# EAGLE board Arduino_MEGA2560_ref (EAGLE 8.0.1)
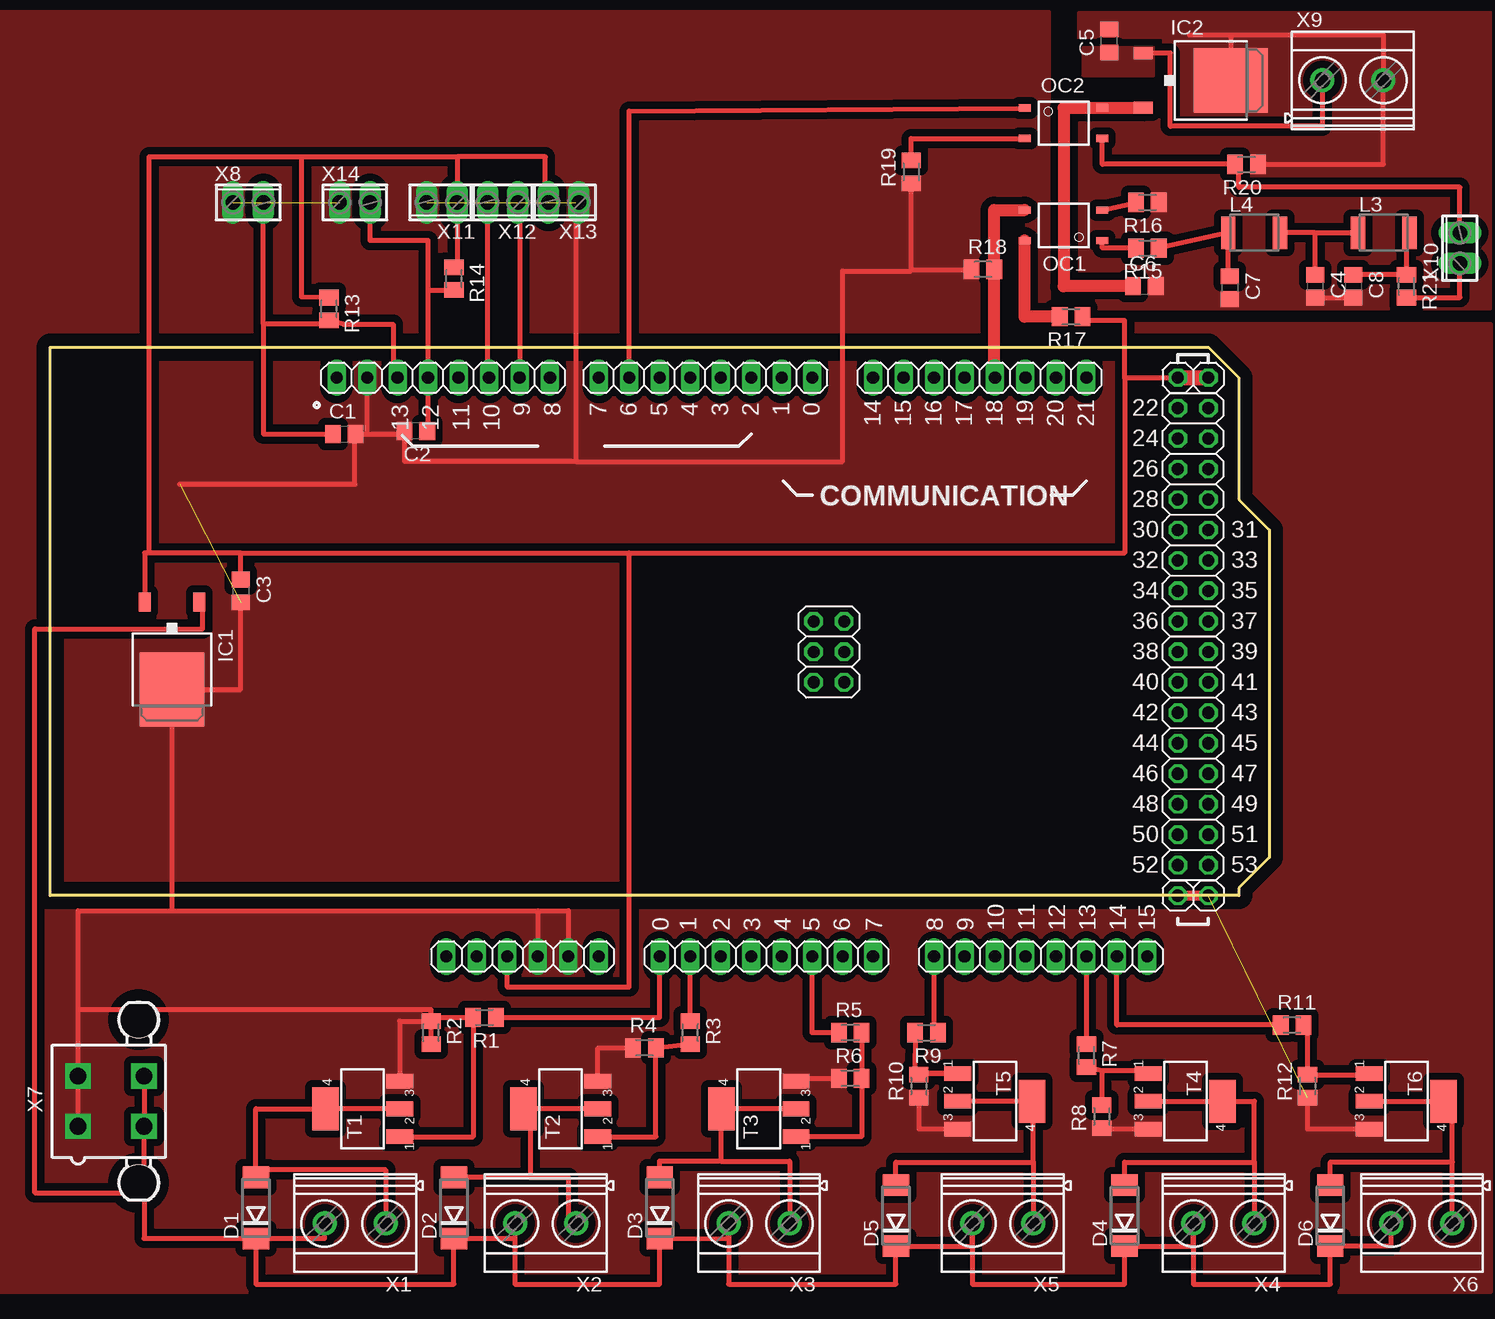
[diagram p0: board, top side]
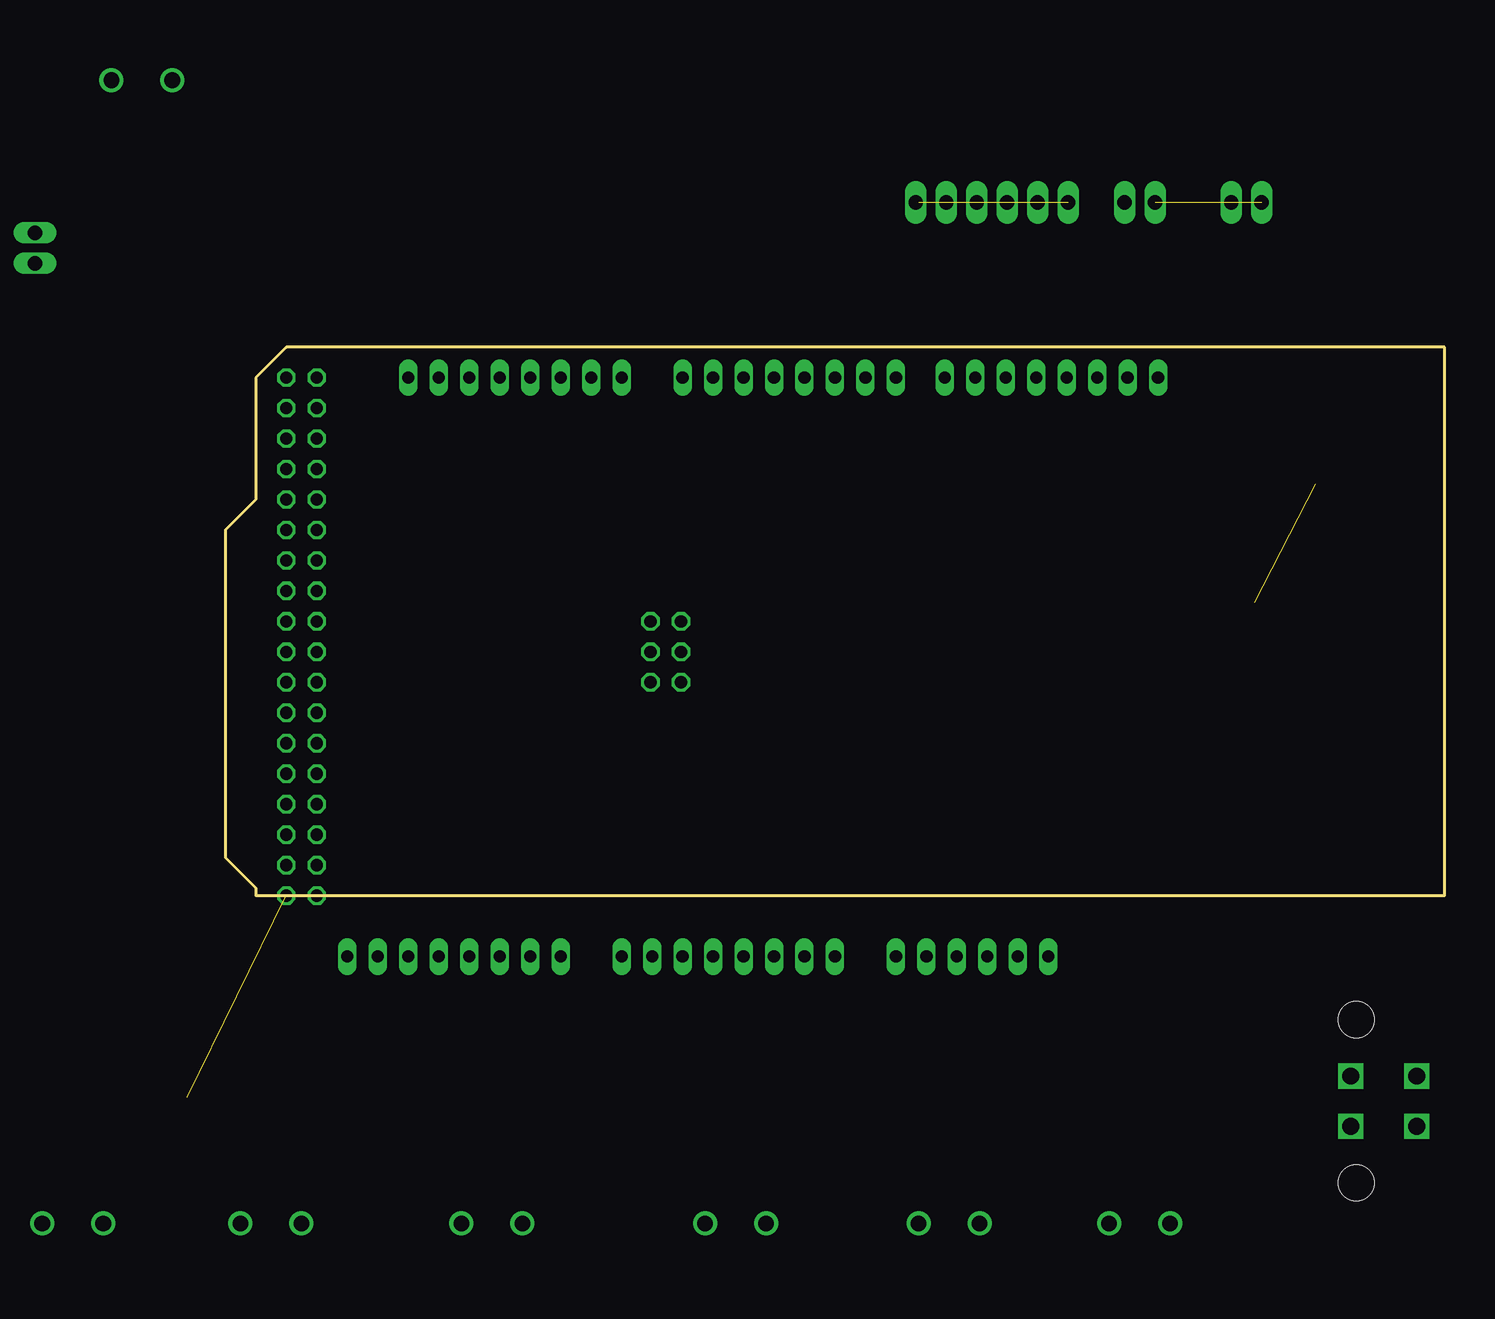
[diagram p1: board, bottom side, seen from below]

Size 101.6 x 45.72 mm. Coordinates in mm from the lower left corner, seen from the top.
Outline: 0,45.72 96.52,45.72 99.06,43.18 99.06,33.02 101.6,30.48 101.6,3.17 99.06,0.64 99.06,0 0,0 0,45.72
Copper layers (1*16): Top 0.035mm / dielectric 1.5mm / Bottom 0.035mm
Design rules "default *": minimum track width 6mil, minimum drill 12mil, track to track 6mil, track to pad 6mil, pad to pad 6mil, via to via 6mil, smd to smd 6mil, copper to edge 40mil, drill to drill 12mil, minimum pad ring 10mil, minimum via ring 10mil, stop-mask expansion 2mil, vias tented up to drill 1mil, thermal gap 10mil
Net classes: 0 default: width 0.152 mm, drill 0.305 mm, clearance 0.152 mm

## Footprints (pad centres in the part's own frame; a part is rotated, then mirrored left to right if it is on the bottom)
1X08 = drill 1.016 long: 1 -8.89,0; 2 -6.35,0; 3 -3.81,0; 4 -1.27,0; 5 1.27,0; 6 3.81,0; 7 6.35,0; 8 8.89,0
C0805 = smd 1.3 x 1.5: 1 -0.95,0; 2 0.95,0
DO214AA = smd 1.8 x 2.2: A 2.55,0; C -2.55,0
TO252 = smd 1 x 1.6: 1 -2.28,-4.8; 2 2.28,-4.8 | smd 5.4 x 6.2: 3 0,2.5
2X03 = drill 1.016 octagon: 1 -2.54,-1.27; 2 -2.54,1.27; 3 0,-1.27; 4 0,1.27; 5 2.54,-1.27; 6 2.54,1.27
1X01 = drill 1.016 octagon: 1 0,0
SM-NE45 = smd 1.2 x 2.7: 1 -2.15,0; 2 2.15,0
SO-4 = smd 1 x 0.6: 1 -3.24,0.635; 2 -3.24,-1.905; 3 3.24,-1.905; 4 3.24,0.635
1X06 = drill 1.016 long: 1 -6.35,0; 2 -3.81,0; 3 -1.27,0; 4 1.27,0; 5 3.81,0; 6 6.35,0
M0805 = smd 1.3 x 1.6: 1 -0.95,0; 2 0.95,0
SOT223 = smd 1.219 x 2.235: D 0,-3.099; G -2.311,-3.099; S 2.311,-3.099 | smd 3.6 x 2.2: D_TAB 0,3.099
MKDSN1,5/2-5,08 = drill 1.3 pad 2: 1 -2.561,0.025; 2 2.519,0.025
5566-4 = drill 1.4 square: 1 2.1,-2.75; 2 -2.1,-2.75; 3 2.1,2.75; 4 -2.1,2.75 | hole 3: 6.8,2.29; -6.8,2.29
2POL254 = drill 1.2 long: 1 -1.27,0; 2 1.27,0
2X08 = drill 1.016 octagon: 1 -8.89,-1.27; 2 -8.89,1.27; 3 -6.35,-1.27; 4 -6.35,1.27; 5 -3.81,-1.27; 6 -3.81,1.27; 7 -1.27,-1.27; 8 -1.27,1.27; 9 1.27,-1.27; 10 1.27,1.27; 11 3.81,-1.27; 12 3.81,1.27; 13 6.35,-1.27; 14 6.35,1.27; 15 8.89,-1.27; 16 8.89,1.27

## Placement (x,y rotation side)
ADCH  [1X08]  82.55,-5.08 0 top  (outside the outline)
ADCL  [1X08]  59.69,-5.08 0 top  (outside the outline)
C1  0.1uF  [C0805]  24.51,38.48 0 top
C2  0.1uF  [C0805]  30.48,38.73 180 top
C3  1uF  [C0805]  15.88,25.4 270 top
C4  1uF  [C0805]  105.41,50.8 270 top  (outside the outline)
C5  [C0805]  88.27,71.25 90 top  (outside the outline)
C6  1uF  [C0805]  91.19,50.8 0 top  (outside the outline)
C7  1uF  [C0805]  98.3,50.67 270 top  (outside the outline)
C8  1uF  [C0805]  108.58,50.8 270 top  (outside the outline)
COMMUNICATION  [1X08]  77.47,43.18 180 top
D1  [DO214AA]  17.14,-26.04 90 top  (outside the outline)
D2  [DO214AA]  33.66,-26.04 90 top  (outside the outline)
D3  [DO214AA]  50.8,-26.04 90 top  (outside the outline)
D4  [DO214AA]  89.53,-26.67 90 top  (outside the outline)
D5  [DO214AA]  70.48,-26.67 90 top  (outside the outline)
D6  [DO214AA]  106.68,-26.67 90 top  (outside the outline)
IC1  7805DT  [TO252]  10.16,19.68 180 top
IC2  7805DT  [TO252]  95.89,67.94 270 top  (outside the outline)
ICSP  ICSP  [2X03]  64.9,20.32 270 top
JP1  [1X01]  93.98,43.18 0 top
JP2  [1X01]  96.52,43.18 0 top
JP3  [1X01]  93.98,0 0 top
JP4  [1X01]  96.52,0 0 top
L3  [SM-NE45]  111.12,55.25 0 top  (outside the outline)
L4  [SM-NE45]  100.33,55.25 0 top  (outside the outline)
OC1  TLP181  [SO-4]  84.45,55.25 180 top  (outside the outline)
OC2  TLP181  [SO-4]  84.45,65.02 0 top  (outside the outline)
POWER  [1X06]  39.37,-5.08 0 top  (outside the outline)
PWMH  [1X08]  32.77,43.18 180 top
PWML  [1X08]  54.61,43.18 180 top
R1  10  [M0805]  36.2,-10.16 180 top  (outside the outline)
R2  1K  [M0805]  31.75,-11.43 270 top  (outside the outline)
R3  10  [M0805]  53.34,-11.43 270 top  (outside the outline)
R4  1K  [M0805]  49.53,-12.7 0 top  (outside the outline)
R5  10  [M0805]  66.67,-11.43 0 top  (outside the outline)
R6  1K  [M0805]  66.67,-15.24 0 top  (outside the outline)
R7  10  [M0805]  86.36,-13.34 270 top  (outside the outline)
R8  1K  [M0805]  87.63,-18.41 90 top  (outside the outline)
R9  10  [M0805]  73.03,-11.43 180 top  (outside the outline)
R10  1K  [M0805]  72.39,-15.88 90 top  (outside the outline)
R11  10  [M0805]  103.5,-10.79 0 top  (outside the outline)
R12  1K  [M0805]  104.78,-15.88 90 top  (outside the outline)
R13  1K  [M0805]  23.24,48.9 270 top
R14  1K  [M0805]  33.66,51.44 270 top  (outside the outline)
R15  10  [M0805]  91.44,53.98 180 top  (outside the outline)
R16  1K  [M0805]  91.44,57.79 180 top  (outside the outline)
R17  10  [M0805]  85.09,48.26 180 top
R18  1K  [M0805]  77.72,52.2 0 top  (outside the outline)
R19  1K  [M0805]  71.75,60.32 90 top  (outside the outline)
R20  1K  [M0805]  99.69,60.96 180 top  (outside the outline)
R21  1K  [M0805]  113.03,50.8 270 top  (outside the outline)
T1  PHT8N06LTSOT223  [SOT223]  26.04,-17.78 90 top  (outside the outline)
T2  PHT8N06LTSOT223  [SOT223]  42.55,-17.78 90 top  (outside the outline)
T3  PHT8N06LTSOT223  [SOT223]  59.05,-17.78 90 top  (outside the outline)
T4  PHT8N06LTSOT223  [SOT223]  94.61,-17.14 270 top  (outside the outline)
T5  PHT8N06LTSOT223  [SOT223]  78.74,-17.14 270 top  (outside the outline)
T6  PHT8N06LTSOT223  [SOT223]  113.03,-17.14 270 top  (outside the outline)
X1  MKDSN1,5/2-5,08  [MKDSN1,5/2-5,08]  25.4,-27.3 180 top  (outside the outline)
X2  MKDSN1,5/2-5,08  [MKDSN1,5/2-5,08]  41.27,-27.3 180 top  (outside the outline)
X3  MKDSN1,5/2-5,08  [MKDSN1,5/2-5,08]  59.05,-27.3 180 top  (outside the outline)
X4  MKDSN1,5/2-5,08  [MKDSN1,5/2-5,08]  97.79,-27.3 180 top  (outside the outline)
X5  MKDSN1,5/2-5,08  [MKDSN1,5/2-5,08]  79.38,-27.3 180 top  (outside the outline)
X6  MKDSN1,5/2-5,08  [MKDSN1,5/2-5,08]  114.3,-27.3 180 top  (outside the outline)
X7  5566-4  [5566-4]  5.08,-17.14 270 top  (outside the outline)
X8  [2POL254]  16.51,57.79 0 top  (outside the outline)
X9  MKDSN1,5/2-5,08  [MKDSN1,5/2-5,08]  108.58,67.94 0 top  (outside the outline)
X10  [2POL254]  117.47,53.98 90 top  (outside the outline)
X11  [2POL254]  32.64,57.79 180 top  (outside the outline)
X12  [2POL254]  37.72,57.79 180 top  (outside the outline)
X13  [2POL254]  42.8,57.79 180 top  (outside the outline)
X14  [2POL254]  25.4,57.79 0 top  (outside the outline)
XIOH  [2X08]  95.25,31.75 90 top
XIOL  [2X08]  95.25,11.43 90 top

## Library data of the parts
ADCH ADCL COMMUNICATION ICSP JP1-JP4 POWER PWMH PWML XIOH XIOL = pinhead
C1-C8 R1-R21 = resistor
D1-D6 = diode
IC1 IC2 = linear
L3 L4 = inductor-neosid; OC_FARNELL: unknown; OC_NEWARK: unknown
OC1 OC2 = optocoupler-3-jcn
T1-T6 = NFET_transistors
X1-X6 X9 = con-phoenix-508
X7 = con-molex; OC_FARNELL: unknown; OC_NEWARK: unknown
X8 X10-X14 = con-phoenix-254; OC_FARNELL: unknown; OC_NEWARK: unknown

## Nets
+3V3: POWER.2
+5V: C3.1 IC1.2 JP1.1 JP2.1 POWER.3 R13.1 R14.1 R17.1 X11.1 X13.2
+5V_1: C6.1 IC2.2 OC2.4
+12V: D1.C D2.C D3.C D4.C D5.C D6.C IC1.1 X1.2 X2.2 X3.2 X4.2 X5.2 X6.2 X7.3 X7.4
+24V: C5.1 IC2.1 X9.1
ADC0: ADCL.1 R1.1
ADC1: ADCL.2 R3.1
ADC2: ADCL.3
ADC3: ADCL.4
ADC4: ADCL.5
ADC5: ADCL.6 R5.1
ADC6: ADCL.7
ADC7: ADCL.8
ADC8: ADCH.1 R9.1
ADC9: ADCH.2
ADC10: ADCH.3
ADC11: ADCH.4
ADC12: ADCH.5
ADC13: ADCH.6 R7.1
ADC14: ADCH.7 R11.1
ADC15: ADCH.8
AREF: PWMH.8
GND: C1.2 C2.2 C3.2 IC1.3 JP3.1 JP4.1 POWER.4 POWER.5 PWMH.7 R2.1 R4.1 R6.1 R8.1 R10.1 R12.1 R18.1 R19.1 T1.S T2.S T3.S T4.S T5.S T6.S X7.1 X7.2 X8.1 X11.2 X13.1 X14.1
GNDA: C4.2 C5.2 C6.2 C7.2 C8.2 IC2.3 R16.1 R20.1 X9.2
N$1: R1.2 R2.2 T1.G
N$2: R3.2 R4.2 T2.G
N$3: R7.2 R8.2 T4.G
N$4: D1.A T1.D T1.D_TAB X1.1
N$5: R5.2 R6.2 T3.G
N$6: D2.A T2.D T2.D_TAB X2.1
N$7: D3.A T3.D T3.D_TAB X3.1
N$8: D4.A T4.D T4.D_TAB X4.1
N$9: R9.2 R10.2 T5.G
N$10: D5.A T5.D T5.D_TAB X5.1
N$11: R11.2 R12.2 T6.G
N$12: D6.A T6.D T6.D_TAB X6.1
N$13: OC1.1 R15.2
N$14: OC1.2 R16.2
N$15: OC1.4 R17.2
N$16: OC2.2 R19.2
N$17: C8.1 L3.2 R21.1
N$18: OC2.3 R20.2 X10.2
N$19: R21.2 X10.1
N$20: C4.1 L3.1 L4.2
N$21: C7.1 L4.1 R15.1
PA0: XIOH.16
PA1: XIOH.15
PA2: XIOH.14
PA3: XIOH.13
PA4: XIOH.12
PA5: XIOH.11
PA6: XIOH.10
PA7: XIOH.9
PB0: XIOL.1
PB1: XIOL.2
PB2: XIOL.3
PB3: XIOL.4
PB4: PWMH.3 X12.2
PB5: PWMH.4
PB6: C2.1 PWMH.5 R14.2 X14.2
PB7: C1.1 PWMH.6 R13.2 X8.2
PC0: XIOH.1
PC1: XIOH.2
PC2: XIOH.3
PC3: XIOH.4
PC4: XIOH.5
PC5: XIOH.6
PC6: XIOH.7
PC7: XIOH.8
PD7: XIOL.16
PE0: PWML.1
PE1: PWML.2
PE3: PWML.6
PE4: PWML.3
PE5: PWML.4
PG0: XIOL.13
PG1: XIOL.14
PG2: XIOL.15
PG5: PWML.5
PH3: OC2.1 PWML.7
PH4: PWML.8
PH5: PWMH.1
PH6: PWMH.2 X12.1
PL0: XIOL.5
PL1: XIOL.6
PL2: XIOL.7
PL3: XIOL.8
PL4: XIOL.9
PL5: XIOL.10
PL6: XIOL.11
PL7: XIOL.12
RXD1: COMMUNICATION.3
RXD2: COMMUNICATION.5
RXD3: COMMUNICATION.7
SCL: COMMUNICATION.1
SDA: COMMUNICATION.2
TXD1/INT3: COMMUNICATION.4 OC1.3 R18.2
TXD2: COMMUNICATION.6
TXD3: COMMUNICATION.8
VIN: POWER.6

## Tracks (layer width: path | path; a pad name or v marks a point on that pad's centre or on a via)
+5V
  Top 0.406: R14.1 33.91,52.39 X11.1 33.91,61.6 | X13.2 41.27,57.79 41.27,61.6 33.91,61.6 | R13.1 20.95,49.91 20.95,61.6 | 20.95,61.6 33.91,61.6 | POWER.3 38.1,-7.62 48.26,-7.62 48.26,28.57 | 15.88,28.57 48.26,28.57 | 15.88,28.57 8.26,28.57 | 8.26,28.57 7.88,28.57 IC1.2 | C3.1 15.88,28.57 | 48.26,28.57 89.53,28.57 89.53,43.18 | 89.53,43.18 JP1.1 | 89.53,43.18 89.53,47.95 86.04,47.95 R17.1 | 8.26,28.57 8.26,61.6 20.95,61.6
  Top 1.27: JP1.1 JP2.1
+5V_1
  Top 0.406: 91.08,65.41 IC2.2
  Top 1.016: C6.1 84.45,50.8 84.45,65.66 OC2.4 IC2.2
+12V
  Top 0.406: D1.C 22.88,-28.59 X1.2 | D1.C 17.14,-32.38 33.66,-32.38 D2.C 38.76,-28.59 X2.2 38.73,-27.33 38.73,-32.38 50.8,-32.38 D3.C 56.52,-28.6 X3.2 56.54,-32.38 70.48,-32.38 D5.C 76.83,-29.23 X5.2 76.86,-32.38 89.53,-32.38 D4.C 95.25,-29.23 X4.2 95.27,-32.38 106.68,-32.38 D6.C 111.76,-29.21 111.76,-27.33 X6.2 111.78,-26.68 | 7.83,-24.77 X7.3 X7.4 | 7.83,-24.77 7.83,-28.59 D1.C | 7.83,-24.77 -1.27,-24.77 -1.27,22.22 12.7,22.22 12.7,24.76 12.44,24.76 IC1.1
+24V
  Top 0.406: 91.76,70.22 IC2.1 93.34,70.22 93.34,64.13 106.02,64.13 X9.1
  pour Top (isolate 0.7, no thermals): 86.11,70.74 91.95,70.74 91.95,68.33 86.11,68.33
ADC0
  Top 0.406: R1.1 50.8,-10.16 ADCL.1
ADC1
  Top 0.406: R3.1 ADCL.2
ADC4
  Bottom 0.203: 60.96,-5.18 ADCL.5
ADC5
  Top 0.406: R5.1 63.5,-11.43 ADCL.6
ADC8
  Top 0.406: R9.1 73.66,-11.43 ADCH.1
ADC13
  Top 0.406: ADCH.6 R7.1
ADC14
  Top 0.406: R11.1 88.9,-10.79 ADCH.7
AREF
  Bottom 0.305: PWMH.8 24.13,42.93
GND  (4 unrouted)
  Top 0.406: 40.64,-1.27 POWER.4 | 40.64,-1.27 43.18,-1.27 POWER.5 | R10.1 72.39,-19.46 T5.S | R8.1 87.63,-19.46 T4.S | R12.1 104.78,-19.46 T6.S | T1.S 29.13,-10.48 R2.1 31.75,-9.53 2.33,-9.53 | T3.S 62.15,-15.24 R6.1 | 2.33,-9.53 X7.2 X7.1 | 2.33,-9.53 2.33,-1.27 10.16,-1.27 | 10.16,-1.27 40.64,-1.27 | T2.S 45.64,-12.7 R4.1 | 26.67,43.18 PWMH.7 26.42,38.48 C1.2 | X13.1 43.81,57.79 43.81,36.2 | 43.81,36.2 29.53,36.2 C2.2 29.53,38.48 C1.2 | 10.79,34.29 25.4,34.29 25.4,38.48 C1.2 | 10.16,-1.27 IC1.3 15.88,17.18 C3.2 | 71.75,52.2 R19.1 | 71.75,52.2 R18.1 | 43.81,36.2 66.04,36.2 66.04,52.07 71.75,52.07 71.75,52.2
  Top 0.813: JP3.1 JP4.1
  pour Top (isolate 0.61, no thermals): -5.08,73.66 83.19,73.66 83.19,73.02 83.19,47.62 120.02,47.62 120.02,-33.02 -5.08,-33.02
GNDA
  Top 0.406: 98.39,71.75 111.12,71.75 111.12,67.97 X9.2 111.1,60.96 R20.1 | 98.39,71.75 IC2.3 | 94.93,71.75 98.39,71.75 | C4.2 C8.2
  pour Top (isolate 0.61, rank 6, no thermals): 85.72,73.66 120.02,73.66 120.02,48.9 85.72,48.9
N$1
  Top 0.406: T1.G 35.24,-20.09 R1.2 31.75,-10.16 R2.2
N$2
  Top 0.406: R3.2 R4.2 50.48,-20.09 T2.G
N$3
  Top 0.406: 91.52,-14.93 T4.G 91.52,-14.61 87.63,-14.61 | 87.63,-14.61 R7.2 | 87.63,-14.61 R8.2
N$4
  Top 0.406: X1.1 27.96,-22.86 17.14,-22.86 | 17.14,-22.86 D1.A | 17.14,-22.86 17.14,-17.77 T1.D_TAB T1.D
N$5
  Top 0.406: R5.2 R6.2 67.62,-20.09 T3.G
N$6
  Top 0.406: 44.45,-27.33 X2.1 43.18,-27.33 43.18,-23.48 40.01,-23.48 | T2.D T2.D_TAB 40.01,-17.14 40.01,-23.48 | 40.01,-23.48 D2.A
N$7
  Top 0.406: T3.D T3.D_TAB 55.88,-17.78 55.88,-22.15 | X3.1 61.62,-22.15 55.88,-22.15 | D3.A 50.8,-22.15 55.88,-22.15
N$8
  Top 0.406: T4.D T4.D_TAB 100.35,-17.14 100.35,-22.23 | 100.35,-22.23 X4.1 | D4.A 89.53,-22.23 100.35,-22.23
N$9
  Top 0.406: R9.2 72.07,-14.83 T5.G 72.39,-14.83 R10.2
N$10
  Top 0.406: T5.D T5.D_TAB 81.94,-17.14 81.94,-22.23 | D5.A 70.48,-22.23 81.94,-22.23 | 81.94,-22.23 X5.1
N$11
  Top 0.406: R11.2 104.78,-10.79 R12.2 109.3,-14.93 T6.G
N$12
  Top 0.406: D6.A 106.68,-22.23 116.84,-22.23 | 116.84,-22.23 116.84,-17.14 T6.D_TAB T6.D | X6.1 116.86,-22.23 116.84,-22.23
N$13
  Top 0.406: R15.2 87.69,53.98 OC1.1
N$14
  Top 0.406: OC1.2 R16.2
N$15
  Top 1.016: R17.2 81.22,48.26 OC1.4
N$16
  Top 0.406: R19.2 71.75,63.12 OC2.2
N$17
  Top 0.406: L3.2 113.03,55.25 R21.1 C8.1
N$18
  Top 0.406: R20.2 87.69,60.96 OC2.3 | 98.42,60.32 R20.2 | X10.2 117.47,59.05 99.06,59.05 99.06,60.96 R20.2
N$19
  Top 0.406: R21.2 117.47,49.85 X10.1
N$20
  Top 0.406: 105.41,55.25 L4.2 | 105.41,55.25 L3.1 | C4.1 105.41,55.25
N$21
  Top 0.406: R15.1 L4.1 98.18,52.26 C7.1
PB4
  Top 0.406: 36.83,43.18 PWMH.3 | PWMH.3 36.45,43.18 | PWMH.3 36.45,43.18 | 36.45,43.18 X12.2
PB6
  Top 0.406: 31.75,43.18 PWMH.5 | C2.1 31.5,38.73 PWMH.5 | PWMH.5 31.5,50.48 | 31.5,50.48 R14.2 | 31.5,50.48 31.5,54.61 26.67,54.61 X14.2
PB7
  Top 0.406: PWMH.6 28.57,43.18 28.57,47.62 24.45,47.62 R13.2 23.24,47.62 17.78,47.62 | 17.78,47.62 X8.2 | 17.78,47.62 17.78,38.48 C1.1
PH3
  Top 0.406: PWML.7 48.26,65.41 OC2.1
PH6
  Top 0.406: X12.1 39.12,57.79 PWMH.2
TXD1/INT3
  Top 0.406: 78.74,52.2 R18.2
  Top 1.016: COMMUNICATION.4 78.67,43.18 R18.2 78.67,57.15 OC1.3

## Text on the board
tPlace: 9 | 8 | 7 | 6 | 5 | 4 | 3 | 2 | 1 | 0 | 22 | 14 | 15 | 16 | 17 | 18 | 19 | 20 | 21 | 13 | 12 | 11 | 10 | 24 | 26 | 28 | 30 | 31 | 32 | 33 | 34 | 35 | 36 | 37 | 38 | 39 | 40 | 41 | 42 | 43 | 44 | 45 | 46 | 47 | 48 | 49 | 50 | 51 | 52 | 53 | 0 | 1 | 2 | 3 | 4 | 5 | 6 | 7 | 8 | 9 | 10 | 11 | 12 | 13 | 14 | 15
ReferenceLC: PC1 | PC2